# Altium PCB pcb.PcbDoc
Units mm, origin at the board's own origin, x right, y up, seen from the top; angles counter-clockwise.
Board outline 152.4 x 101.6 mm, 2 copper layers (Top Layer, Bottom Layer); 9 components, 6 nets, 18 pads, 0 vias.
Unrouted connection lines stored in the file: 1.
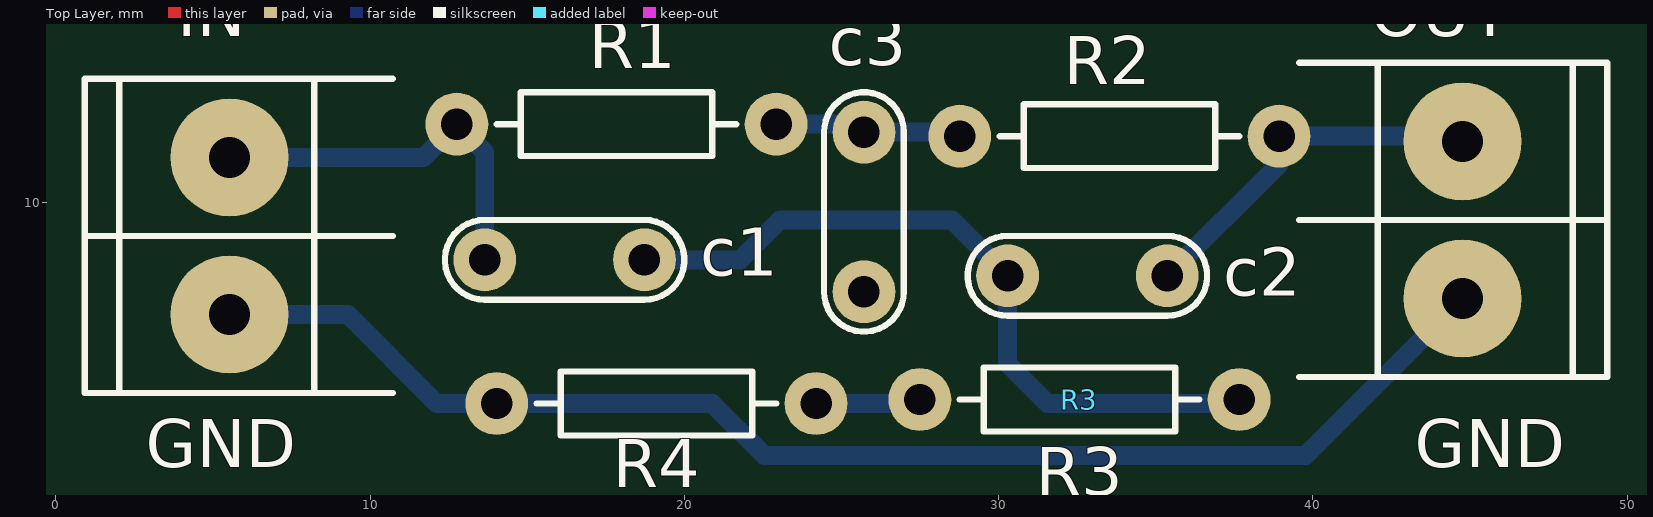
[diagram p0: Top Layer view]
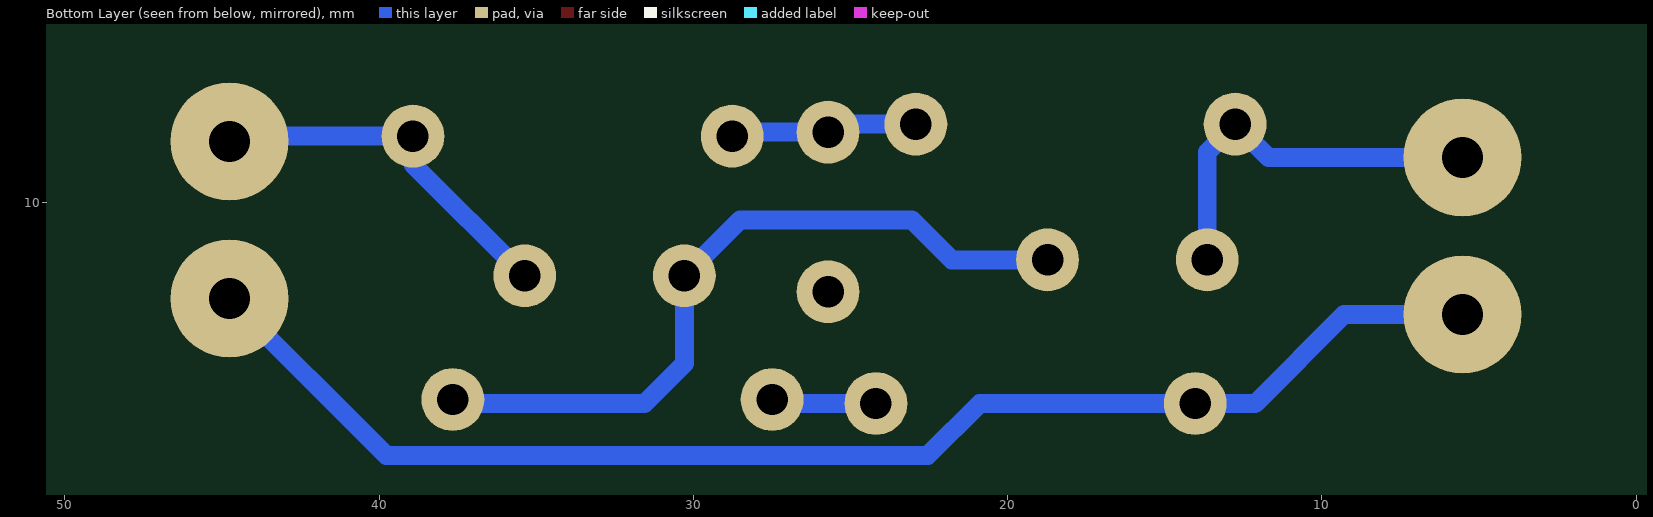
[diagram p1: Bottom Layer view, seen from below]
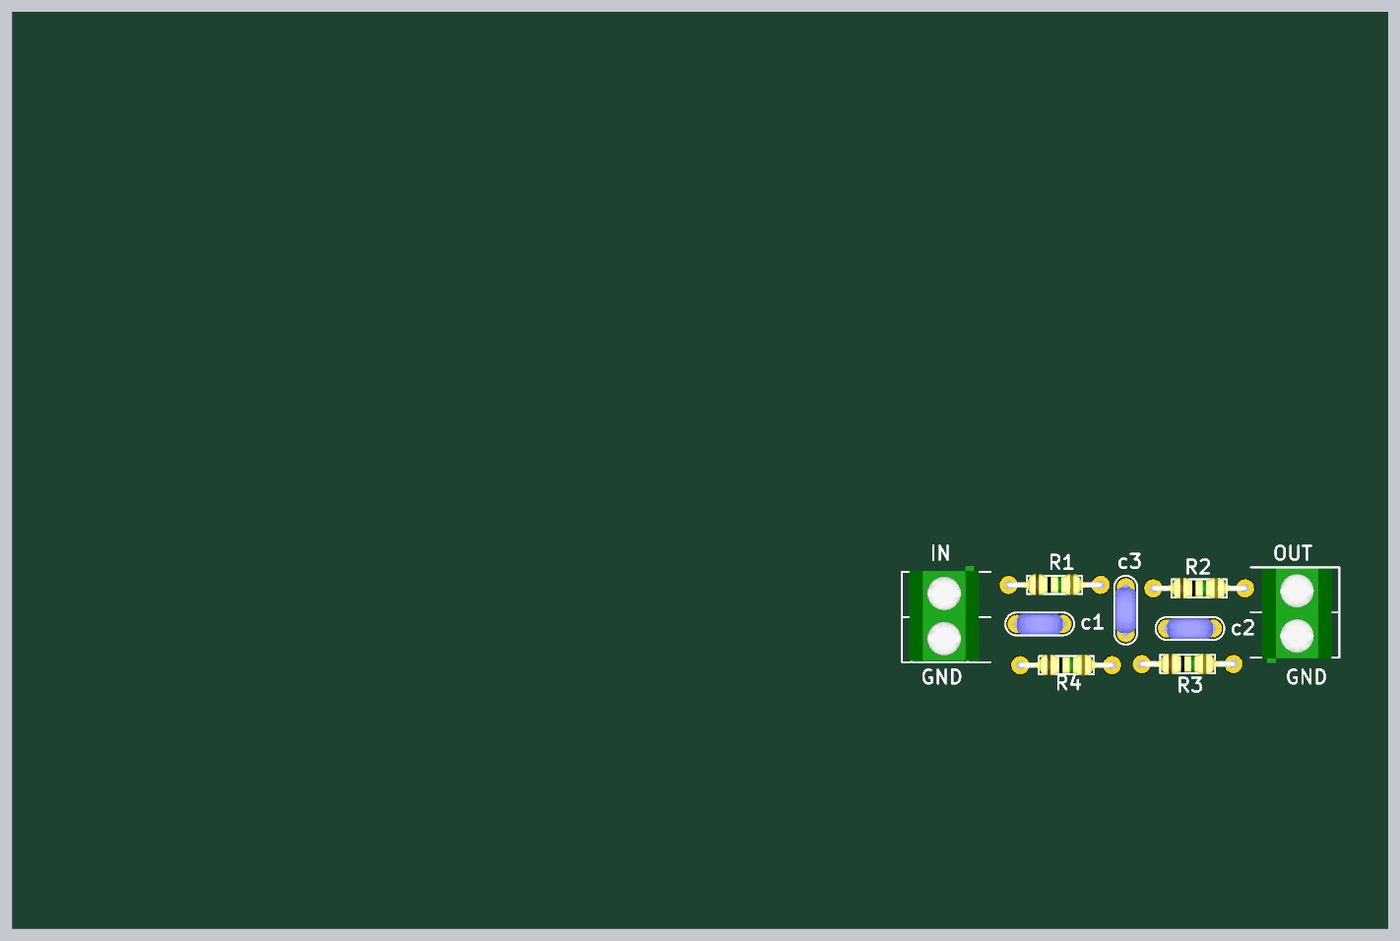
[diagram p2: 3D render of the assembled board from above, using the file's embedded part models]

## Layer stack, top to bottom
Top Solder: solder mask 0.0102, Solder Resist, Dk 3.5
Top Layer: signal copper 0.0356
Dielectric 1: dielectric 0.32, FR-4, Dk 4.8
Bottom Layer: signal copper 0.0356
Bottom Solder: solder mask 0.0102, Solder Resist, Dk 3.5

## Board outline
-97.6,-25.6 54.8,-25.6 54.8,76 -97.6,76

## Design rules (kind name [scope] priority, off if disabled: settings)
Clearance [All] p1: gap=0.3
PolygonConnect [All] p1: connectstyle=Relief reliefconductorwidth=0.254 reliefentries=4 polygonreliefangle="90 Angle" airgapwidth=0.254
RoutingVias [All] p1: holewidth=0.711 width=1.27 viastyle="Through Hole" minholewidth=0.711 minwidth=1.27 maxholewidth=0.711 maxwidth=1.27
SolderMaskExpansion [All] p1: expansion=0.102
Width [All] p1: maxlimit=0.6 minlimit=0.6 preferedwidth=0.6
30 further rules are at their usual default settings.

## Components (designator, comment, footprint, x,y, rotation, side; value= is the part's Value field where it differs from the comment)
c1 "2.5n" CAP200 16.192,8.182 r0 top
c2 "2.5n" CAP200 32.829,7.674 r0 top
c3 "5n" CAP200 25.717,9.706 r270 top
IN "BORNERA 2" BORNERA2 5.524,8.944 r0 top (schematic designator B1)
OUT "BORNERA 2" BORNERA2 44.767,9.452 r180 top (schematic designator B2)
R1 "8k2" RES400 12.763,12.5 r0 top
R2 "8K2" RES400 28.765,12.119 r0 top
R3 "3K3" RES400 27.495,3.737 r0 top
R4 "1K" RES400 14.033,3.61 r0 top

## Footprints (in the part's own frame and the unit in brackets; to place one, negate y for a bottom-side part, rotate by r counter-clockwise, add the part's x,y. Pads: shape width x height; smd on the part's side, far side on the other; paste and mask are expansions set on the pad)
BORNERA2 [mm] "Bornera con Tornillos 5mm separación"
  round 3.75 hole 1.3: 1(0,2.5) 2(0,-2.5)
  silkscreen extent -4.6,-5 5.2,5, body extent -3.76,-4.89 3.94,5.61, height 10
CAP200 [mm]
  round 2 hole 1: 1(-2.54,0) 2(2.54,0)
  silkscreen extent -3.81,-1.27 3.81,1.27, body extent -2.79,-1.17 2.79,1.12, height 6.24
RES400 [mm]
  round 2 hole 1: 1(0,0) 2(10.16,0)
  silkscreen extent 1.27,-1.02 8.89,1.02, body extent -0.3,-1.14 10.46,1.17, height 2.43

## Part data
c1 c2 c3: library part CAP
R1 R2 R3 R4: library part RES

## Nets (pads, with @x,y where several pads share a name; then routed paths per layer and width w, separated by ;. In a path a pad name is that pad's centre, name@x,y a point inside that pad or via, vN(x,y) a via of type N, cw(c..) or ccw(c..) an arc to the next point about the centre after c; other vN are vias at no path point)
GND: c3.2 IN.2 OUT.1 R4.1 | length 43.2
  Bottom Layer w0.6: IN.2 9.294,6.444 12.128,3.61 R4.1 20.891,3.61 22.542,1.959 39.774,1.959 OUT.1
NetB1_1: c1.1 IN.1 R1.1 | length 12.4
  Bottom Layer w0.6: IN.1 11.707,11.444 R1.1 13.652,11.611 c1.1
NetB2_2: c2.2 OUT.2 R2.2 | length 11.8
  Bottom Layer w0.6: c2.2 38.925,11.23 R2.2 44.6,12.119 OUT.2
Netc1_2: c1.2 c2.1 R3.2 | length 23.6
  Bottom Layer w0.6: c1.2 21.78,8.182 23.05,9.452 28.511,9.452 c2.1 30.289,4.88 31.559,3.61 37.528,3.61 R3.2
Netc3_1: c3.1 R1.2 R2.1 | length 6
  Bottom Layer w0.6: R1.2 25.463,12.5 c3.1 28.638,12.246 R2.1
NetR3_1: R3.1 R4.2 | length 3.4
  Bottom Layer w0.6: R4.2 27.368,3.61 R3.1

## Silkscreen, mask and mechanical layers (free items; w line width, h text height)
Top Overlay:
  text "GND" at 2.857,1.578 h1.52
  text "GND" at 43.243,1.578 h1.52